# Altium PCB BREAKOUT_BOARD.PcbDoc
Units mil, origin at the board's own origin, x right, y up, seen from the top; angles counter-clockwise.
Board outline 6000 x 4000 mil, 2 copper layers (Top Layer, Bottom Layer); 13 components, 85 nets, 170 pads, 0 vias.
Unrouted connection lines stored in the file: 77.
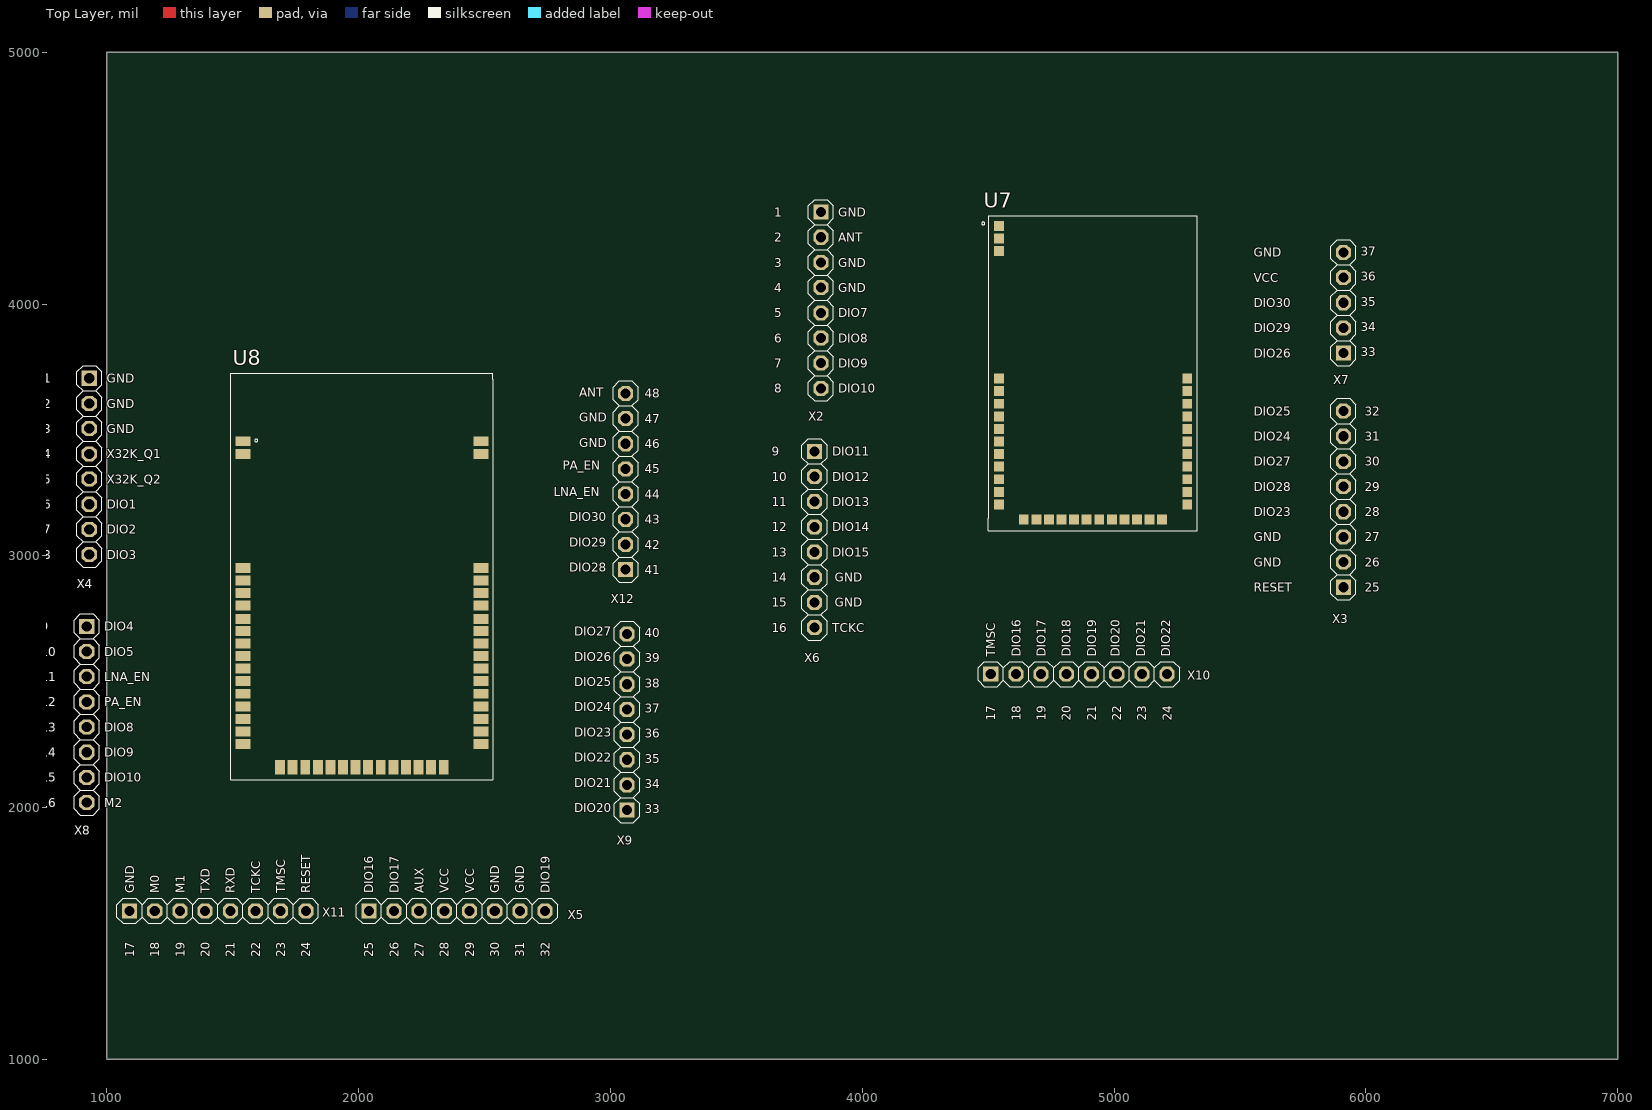
[diagram p0: Top Layer view]
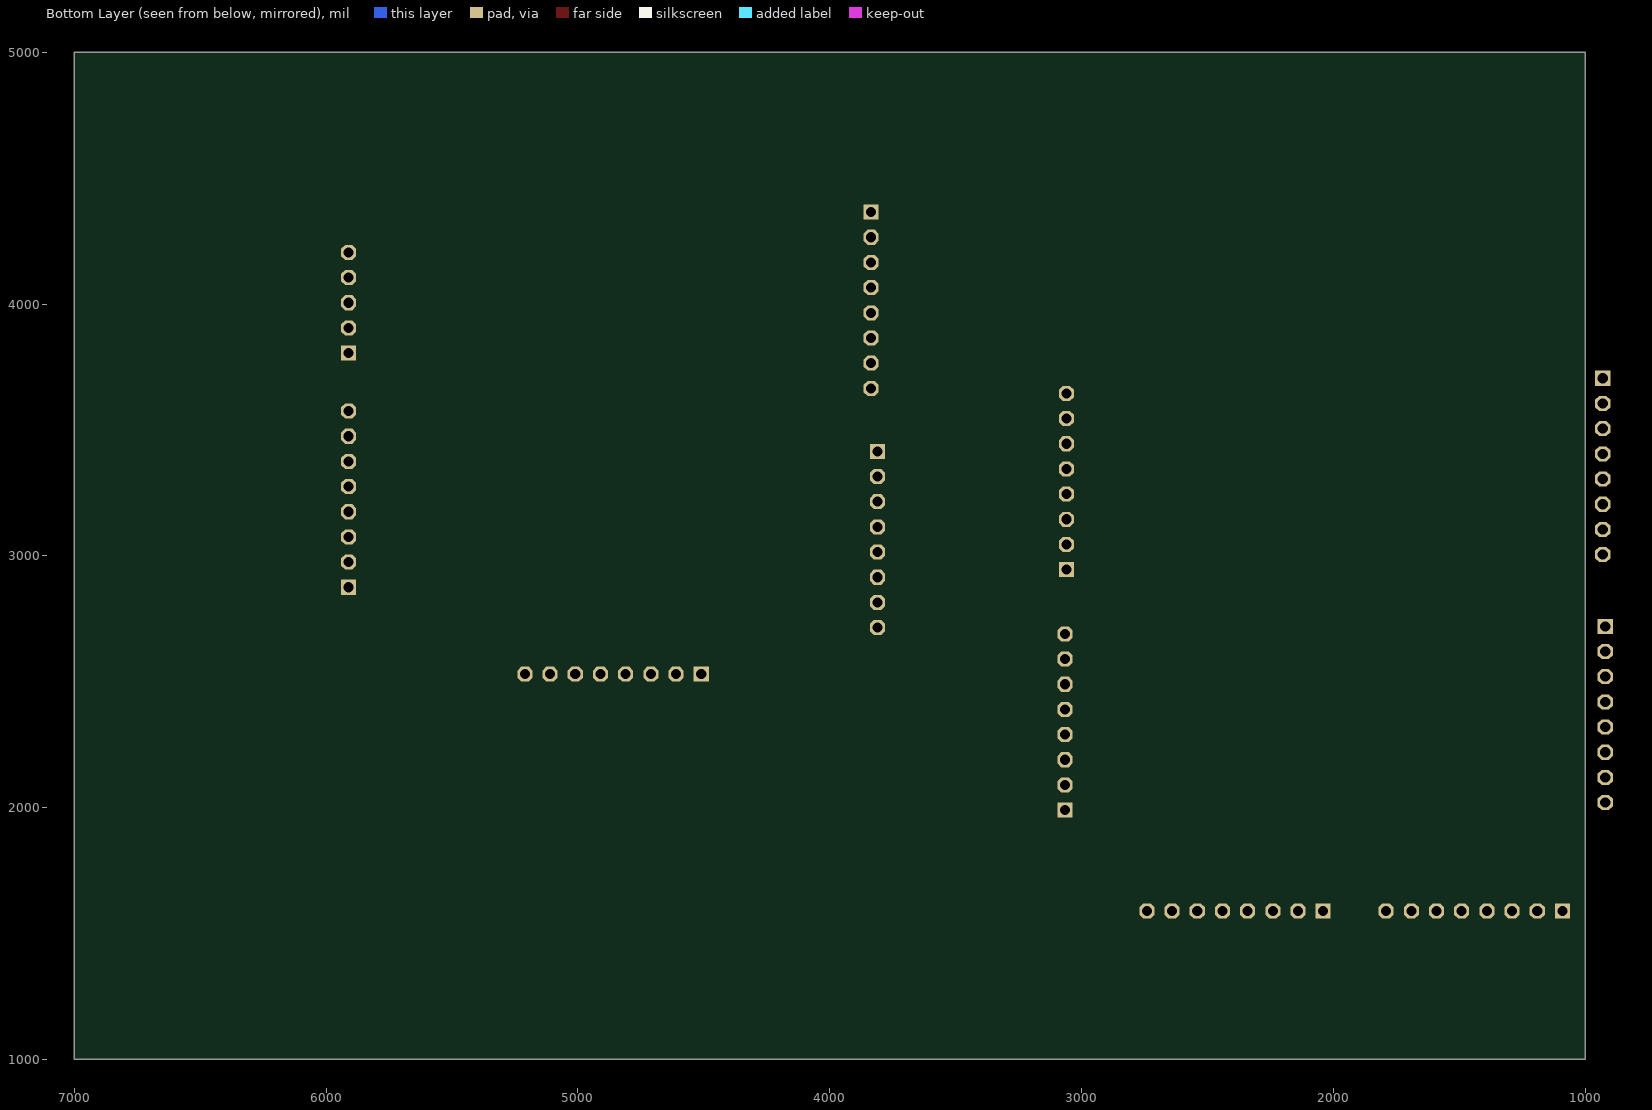
[diagram p1: Bottom Layer view, seen from below]

## Layer stack, top to bottom
Top Solder: solder mask 0.4, Solder Resist, Dk 3.5
Top Layer: signal copper 1.4
Dielectric 1: dielectric 12.6, FR-4, Dk 4.8
Bottom Layer: signal copper 1.4
Bottom Solder: solder mask 0.4, Solder Resist, Dk 3.5

## Board outline
1000,1000 7000,1000 7000,5000 1000,5000

## Design rules (kind name [scope] priority, off if disabled: settings)
Clearance [All] p1: gap=10 ignorepadtopadclearanceinfootprint=FALSE except(0: Arc-Hole Track-Hole SMDPad-Hole THPad-Hole Via-Hole Fill-Hole Poly-Hole Region-Hole Text-Hole)
PolygonConnect [All] p1: connectstyle=Relief reliefconductorwidth=10 reliefentries=4 polygonreliefangle="90 Angle" airgapwidth=10
RoutingVias [All] p1: holewidth=28 width=50 viastyle="Through Hole" minholewidth=28 minwidth=50 maxholewidth=28 maxwidth=50
SolderMaskExpansion [All] p1: expansion=4
Width [All] p1: maxlimit=10 minlimit=10 preferedwidth=10
30 further rules are at their usual default settings.

## Classes and differential pairs
component class E70_AND_E79: U7 U8 X2 X3 X4 X5 X6 X7 X8 X9 X10 X11

## Components (designator, comment, footprint, x,y, rotation, side; value= is the part's Value field where it differs from the comment)
U7 "E79-900DM2005S" E79-900DM2005S 4940,3760 r0 top
U8 "E70-868T30S" E70-868T30S 2012.44,2917.99 r0 top
X2 "Berg 8-Pin, 2.54mm" "Berg 8-Pin, 2.54MM" 3835,4015 r270 top
X3 "Berg 8-Pin, 2.54mm" "Berg 8-Pin, 2.54MM" 5910,3225 r90 top
X4 "Berg 8-Pin, 2.54mm" "Berg 8-Pin, 2.54MM" 930,3355 r270 top
X5 "Berg 8-Pin, 2.54mm" "Berg 8-Pin, 2.54MM" 2390,1590 r0 top
X6 "Berg 8-Pin, 2.54mm" "Berg 8-Pin, 2.54MM" 3810,3065 r270 top
X7 "Berg 5-Pin, 2.54mm" "Berg 5-Pin, 2.54MM" 5910,4005 r90 top
X8 "Berg 8-Pin, 2.54mm" "Berg 8-Pin, 2.54MM" 920,2370 r270 top
X9 "Berg 8-Pin, 2.54mm" "Berg 8-Pin, 2.54MM" 3065,2340 r90 top
X10 "Berg 8-Pin, 2.54mm" "Berg 8-Pin, 2.54MM" 4860,2530 r0 top
X11 "Berg 8-Pin, 2.54mm" "Berg 8-Pin, 2.54MM" 1440,1590 r0 top
X12 "Berg 8-Pin, 2.54mm" "Berg 8-Pin, 2.54MM" 3060,3295 r90 top

## Footprints (in the part's own frame and the unit in brackets; to place one, negate y for a bottom-side part, rotate by r counter-clockwise, add the part's x,y. Pads: shape width x height; smd on the part's side, far side on the other; paste and mask are expansions set on the pad)
"Berg 5-Pin, 2.54MM" [mil] "Berg 5-Pin, 2.54mm pitch"
  rect 60x60 hole 40.16: 1(-200,0)
  oct 60x60 hole 40.16: 2(-100,0) 3(0,0) 4(100,0) 5(200,0)
  silkscreen extent -250,-50 250,50, body extent -250,-49 250,49, height 336
"Berg 8-Pin, 2.54MM" [mil] "Berg 8-Pin, 2.54mm pitch"
  rect 60x60 hole 40.16: 1(-350,0)
  oct 60x60 hole 40.16: 2(-250,0) 3(-150,0) 4(-50,0) 5(50,0) 6(150,0) 7(250,0) 8(350,0)
  silkscreen extent -400,-50 400,50, body extent -400,-50 400,48, height 336
E70-868T30S [mm]
  rect 1.5x1 smd: 1(-12,13.64) 2(-12,12.37) 3(-12,0.87) 4(-12,-0.4) 5(-12,-1.67) 6(-12,-2.94) 7(-12,-4.27) 8(-12,-5.48) 9(-12,-6.75) 10(-12,-8.02) 11(-12,-9.29) 12(-12,-10.56) 13(-12,-11.83) 14(-12,-13.1) 15(-12,-14.37) 16(-12,-15.64) 17(-12,-16.91) 32(12,-16.91) 33(12,-15.64) 34(12,-14.37) 35(12,-13.1) 36(12,-11.83) 37(12,-10.56) 38(12,-9.29) 39(12,-8.02) 40(12,-6.75) 41(12,-5.48) 42(12,-4.27) 43(12,-2.94) 44(12,-1.67) 45(12,-0.4) 46(12,0.87) 47(12,12.37) 48(12,13.64)
  rect 1x1.5 smd: 18(-8.255,-19.25) 19(-6.985,-19.25) 20(-5.715,-19.25) 21(-4.445,-19.25) 22(-3.175,-19.25) 23(-1.905,-19.25) 24(-0.635,-19.25) 25(0.635,-19.25) 26(1.905,-19.25) 27(3.175,-19.25) 28(4.445,-19.25) 29(5.715,-19.25) 30(6.985,-19.25) 31(8.255,-19.25)
  silkscreen extent -13.25,-20.5 13.21,20.5
E79-900DM2005S [mm]
  rect 1x1 smd: 1(-10.102,13.976) 2(-10.102,12.706) 3(-10.102,11.436) 4(-10.102,-1.424) 5(-10.102,-2.694) 6(-10.102,-3.964) 7(-10.102,-5.234) 8(-10.102,-6.504) 9(-10.102,-7.774) 10(-10.102,-9.044) 11(-10.102,-10.314) 12(-10.102,-11.584) 13(-10.102,-12.854) 14(-10.102,-14.124) 15(-7.602,-15.624) 16(-6.332,-15.624) 17(-5.062,-15.624) 18(-3.792,-15.624) 19(-2.522,-15.624) 20(-1.252,-15.624) 21(0.018,-15.624) 22(1.288,-15.624) 23(2.558,-15.624) 24(3.828,-15.624) 25(5.098,-15.624) 26(6.368,-15.624) 27(8.898,-14.124) 28(8.898,-12.854) 29(8.898,-11.584) 30(8.898,-10.314) 31(8.898,-9.044) 32(8.898,-7.774) 33(8.898,-6.504) 34(8.898,-5.234) 35(8.898,-3.964) 36(8.898,-2.694) 37(8.898,-1.424)
  silkscreen extent -11.83,-16.76 9.91,14.99

## Part data
U7: library part CMP-ROOT-0001-1, "LORA MODULE"
U8: library part CMP-ROOT-0002-4, "WIRELESS LORA MODULE"
X2 X3 X4 X5 X6 X8 X9 X10 X11 X12: library part CMP-003-0075-1, "Berg 8-Pin, 2.54mm pitch", Design Item ID="Berg 8-Pin, 2.54mm", Source=Headers.SchLib
X7: library part CMP-003-0073-1, "Berg 5-Pin, 2.54mm pitch", Design Item ID="Berg 5-Pin, 2.54mm", Source=Headers.SchLib

## Nets (pads, with @x,y where several pads share a name; then routed paths per layer and width w, separated by ;. In a path a pad name is that pad's centre, name@x,y a point inside that pad or via, vN(x,y) a via of type N, cw(c..) or ccw(c..) an arc to the next point about the centre after c; other vN are vias at no path point)
E70-PIN01-L3V0: U8.1 X4.1
E70-PIN02-L3V0: U8.2 X4.2
E70-PIN03-L3V0: U8.3 X4.3
E70-PIN04-L3V0: U8.4 X4.4
E70-PIN05-L3V0: U8.5 X4.5
E70-PIN06-L3V0: U8.6 X4.6
E70-PIN07-L3V0: U8.7 X4.7
E70-PIN08-L3V0: U8.8 X4.8
E70-PIN09-L3V0: U8.9 X8.1
E70-PIN10-L3V0: U8.10 X8.2
E70-PIN11-L3V0: U8.11 X8.3
E70-PIN12-L3V0: U8.12 X8.4
E70-PIN13-L3V0: U8.13 X8.5
E70-PIN14-L3V0: U8.14 X8.6
E70-PIN15-L3V0: U8.15 X8.7
E70-PIN16-L3V0: U8.16 X8.8
E70-PIN17-L3V0: U8.17 X11.1
E70-PIN18-L3V0: U8.18 X11.2
E70-PIN19-L3V0: U8.19 X11.3
E70-PIN20-L3V0: U8.20 X11.4
E70-PIN21-L3V0: U8.21 X11.5
E70-PIN22-L3V0: U8.22 X11.6
E70-PIN23-L3V0: U8.23 X11.7
E70-PIN24-L3V0: U8.24 X11.8
E70-PIN25-L3V0: U8.25 X5.1
E70-PIN26-L3V0: U8.26 X5.2
E70-PIN27-L3V0: U8.27 X5.3
E70-PIN28-L3V0: U8.28 X5.4
E70-PIN29-L3V0: U8.29 X5.5
E70-PIN30-L3V0: U8.30 X5.6
E70-PIN31-L3V0: U8.31 X5.7
E70-PIN32-L3V0: U8.32 X5.8
E70-PIN33-L3V0: U8.33 X9.1
E70-PIN34-L3V0: U8.34 X9.2
E70-PIN35-L3V0: U8.35 X9.3
E70-PIN36-L3V0: U8.36 X9.4
E70-PIN37-L3V0: U8.37 X9.5
E70-PIN38-L3V0: U8.38 X9.6
E70-PIN39-L3V0: U8.39 X9.7
E70-PIN40-L3V0: U8.40 X9.8
E70-PIN41-L3V0: U8.41
E70-PIN42-L3V0: U8.42
E70-PIN43-L3V0: U8.43
E70-PIN44-L3V0: U8.44
E70-PIN45-L3V0: U8.45
E70-PIN46-L3V0: U8.46
E70-PIN47-L3V0: U8.47
E70-PIN48-L3V0: U8.48
E79-PIN01-L3V0: U7.1 X2.1
E79-PIN02-L3V0: U7.2 X2.2
E79-PIN03-L3V0: U7.3 X2.3
E79-PIN04-L3V0: U7.4 X2.4
E79-PIN05-L3V0: U7.5 X2.5
E79-PIN06-L3V0: U7.6 X2.6
E79-PIN07-L3V0: U7.7 X2.7
E79-PIN08-L3V0: U7.8 X2.8
E79-PIN09-L3V0: U7.9 X6.1
E79-PIN10-L3V0: U7.10 X6.2
E79-PIN11-L3V0: U7.11 X6.3
E79-PIN12-L3V0: U7.12 X6.4
E79-PIN13-L3V0: U7.13 X6.5
E79-PIN14-L3V0: U7.14 X6.6
E79-PIN15-L3V0: U7.15 X6.7
E79-PIN16-L3V0: U7.16 X6.8
E79-PIN17-L3V0: U7.17 X10.1
E79-PIN18-L3V0: U7.18 X10.2
E79-PIN19-L3V0: U7.19 X10.3
E79-PIN20-L3V0: U7.20 X10.4
E79-PIN21-L3V0: U7.21 X10.5
E79-PIN22-L3V0: U7.22 X10.6
E79-PIN23-L3V0: U7.23 X10.7
E79-PIN24-L3V0: U7.24 X10.8
E79-PIN25-L3V0: U7.25 X3.1
E79-PIN26-L3V0: U7.26 X3.2
E79-PIN27-L3V0: U7.27 X3.3
E79-PIN28-L3V0: U7.28 X3.4
E79-PIN29-L3V0: U7.29 X3.5
E79-PIN30-L3V0: U7.30 X3.6
E79-PIN31-L3V0: U7.31 X3.7
E79-PIN32-L3V0: U7.32 X3.8
E79-PIN33-L3V0: U7.33 X7.1
E79-PIN34-L3V0: U7.34 X7.2
E79-PIN35-L3V0: U7.35 X7.3
E79-PIN36-L3V0: U7.36 X7.4
E79-PIN37-L3V0: U7.37 X7.5
pads on no net: X12.1 X12.2 X12.3 X12.4 X12.5 X12.6 X12.7 X12.8

## Silkscreen, mask and mechanical layers (free items; w line width, h text height)
Top Overlay:
  text "1" at 3650,4335 h60
  text "GND" at 3905,4335 h60
  text "2" at 3650,4235 h60
  text "ANT" at 3905,4235 h60
  text "37" at 5980,4180 h60
  text "GND" at 5555,4175 h60
  text "3" at 3650,4135 h60
  text "GND" at 3905,4135 h60
  text "36" at 5980,4080 h60
  text "VCC" at 5555,4075 h60
  text "4" at 3650,4035 h60
  text "GND" at 3905,4035 h60
  text "35" at 5980,3980 h60
  text "DIO30" at 5555,3975 h60
  text "5" at 3650,3935 h60
  text "DIO7" at 3905,3935 h60
  text "34" at 5980,3880 h60
  text "DIO29" at 5555,3875 h60
  text "6" at 3650,3835 h60
  text "DIO8" at 3905,3835 h60
  text "33" at 5980,3780 h60
  text "DIO26" at 5555,3775 h60
  text "7" at 3650,3735 h60
  text "DIO9" at 3905,3735 h60
  text "1" at 745,3675 h60
  text "GND" at 1000,3675 h60
  text "8" at 3650,3635 h60
  text "DIO10" at 3905,3635 h60
  text "ANT" at 2875,3620 h60
  text "48" at 3135,3615 h60
  text "2" at 745,3575 h60
  text "GND" at 1000,3575 h60
  text "DIO25" at 5555,3545 h60
  text "32" at 5995,3545 h60
  text "GND" at 2875,3520 h60
  text "47" at 3135,3515 h60
  text "3" at 745,3475 h60
  text "GND" at 1000,3475 h60
  text "DIO24" at 5555,3445 h60
  text "31" at 5995,3445 h60
  text "GND" at 2875,3420 h60
  text "46" at 3135,3415 h60
  text "9" at 3640,3385 h60
  text "DIO11" at 3880,3385 h60
  text "4" at 745,3375 h60
  text "X32K_Q1" at 1000,3375 h60
  text "DIO27" at 5555,3345 h60
  text "30" at 5995,3345 h60
  text "PA_EN" at 2810,3330 h60
  text "45" at 3135,3315 h60
  text "10" at 3640,3285 h60
  text "DIO12" at 3880,3285 h60
  text "5" at 745,3275 h60
  text "X32K_Q2" at 1000,3275 h60
  text "DIO28" at 5555,3245 h60
  text "29" at 5995,3245 h60
  text "LNA_EN" at 2775,3225 h60
  text "44" at 3135,3215 h60
  text "11" at 3640,3185 h60
  text "DIO13" at 3880,3185 h60
  text "6" at 745,3175 h60
  text "DIO1" at 1000,3175 h60
  text "DIO23" at 5555,3145 h60
  text "28" at 5995,3145 h60
  text "DIO30" at 2835,3125 h60
  text "43" at 3135,3115 h60
  text "12" at 3640,3085 h60
  text "DIO14" at 3880,3085 h60
  text "7" at 745,3075 h60
  text "DIO2" at 1000,3075 h60
  text "GND" at 5555,3045 h60
  text "27" at 5995,3045 h60
  text "DIO29" at 2835,3025 h60
  text "42" at 3135,3015 h60
  text "13" at 3640,2985 h60
  text "DIO15" at 3880,2985 h60
  text "8" at 745,2975 h60
  text "DIO3" at 1000,2975 h60
  text "GND" at 5555,2945 h60
  text "26" at 5995,2945 h60
  text "DIO28" at 2835,2925 h60
  text "41" at 3135,2915 h60
  text "14" at 3640,2885 h60
  text "GND" at 3890,2885 h60
  text "RESET" at 5555,2845 h60
  text "25" at 5995,2845 h60
  text "15" at 3640,2785 h60
  text "GND" at 3890,2785 h60
  text "9" at 735,2690 h60
  text "DIO4" at 990,2690 h60
  text "16" at 3640,2685 h60
  text "TCKC" at 3880,2685 h60
  text "DIO27" at 2855,2670 h60
  text "40" at 3135,2665 h60
  text "TMSC" at 4540,2600 h60 r90
  text "DIO16" at 4640,2600 h60 r90
  text "DIO17" at 4740,2600 h60 r90
  text "DIO18" at 4840,2600 h60 r90
  text "DIO19" at 4940,2600 h60 r90
  text "DIO20" at 5035,2600 h60 r90
  text "DIO21" at 5135,2600 h60 r90
  text "DIO22" at 5235,2600 h60 r90
  text "10" at 735,2590 h60
  text "DIO5" at 990,2590 h60
  text "DIO26" at 2855,2570 h60
  text "39" at 3135,2565 h60
  text "11" at 735,2490 h60
  text "LNA_EN" at 990,2490 h60
  text "DIO25" at 2855,2470 h60
  text "38" at 3135,2465 h60
  text "12" at 735,2390 h60
  text "PA_EN" at 990,2390 h60
  text "DIO24" at 2855,2370 h60
  text "37" at 3135,2365 h60
  text "17" at 4540,2345 h60 r90
  text "18" at 4640,2345 h60 r90
  text "19" at 4740,2345 h60 r90
  text "20" at 4840,2345 h60 r90
  text "21" at 4940,2345 h60 r90
  text "22" at 5040,2345 h60 r90
  text "23" at 5140,2345 h60 r90
  text "24" at 5240,2345 h60 r90
  text "13" at 735,2290 h60
  text "DIO8" at 990,2290 h60
  text "DIO23" at 2855,2270 h60
  text "36" at 3135,2265 h60
  text "14" at 735,2190 h60
  text "DIO9" at 990,2190 h60
  text "DIO22" at 2855,2170 h60
  text "35" at 3135,2165 h60
  text "15" at 735,2090 h60
  text "DIO10" at 990,2090 h60
  text "DIO21" at 2855,2070 h60
  text "34" at 3135,2065 h60
  text "16" at 735,1990 h60
  text "M2" at 990,1990 h60
  text "DIO20" at 2855,1970 h60
  text "33" at 3135,1965 h60
  text "GND" at 1120,1660 h60 r90
  text "M0" at 1220,1660 h60 r90
  text "M1" at 1320,1660 h60 r90
  text "TXD" at 1420,1660 h60 r90
  text "RXD" at 1520,1660 h60 r90
  text "TCKC" at 1620,1660 h60 r90
  text "TMSC" at 1720,1660 h60 r90
  text "RESET" at 1820,1660 h60 r90
  text "DIO16" at 2070,1660 h60 r90
  text "DIO17" at 2170,1660 h60 r90
  text "AUX" at 2270,1660 h60 r90
  text "VCC" at 2370,1660 h60 r90
  text "VCC" at 2470,1660 h60 r90
  text "GND" at 2570,1660 h60 r90
  text "GND" at 2670,1660 h60 r90
  text "DIO19" at 2770,1660 h60 r90
  text "17" at 1120,1405 h60 r90
  text "18" at 1220,1405 h60 r90
  text "19" at 1320,1405 h60 r90
  text "20" at 1420,1405 h60 r90
  text "21" at 1520,1405 h60 r90
  text "22" at 1620,1405 h60 r90
  text "23" at 1720,1405 h60 r90
  text "24" at 1820,1405 h60 r90
  text "25" at 2070,1405 h60 r90
  text "26" at 2170,1405 h60 r90
  text "27" at 2270,1405 h60 r90
  text "28" at 2370,1405 h60 r90
  text "29" at 2470,1405 h60 r90
  text "30" at 2570,1405 h60 r90
  text "31" at 2670,1405 h60 r90
  text "32" at 2770,1405 h60 r90